# Altium PCB DO NOT USE LKAS-EPS_PCB_V2I1.PcbDoc (part 2 of 2)
Units mil, origin at the board's own origin, x right, y up, seen from the top; angles counter-clockwise.
Board outline 1667 x 1739 mil, 2 copper layers (Top Layer, Bottom Layer); 50 components, 66 nets, 279 pads, 103 vias.
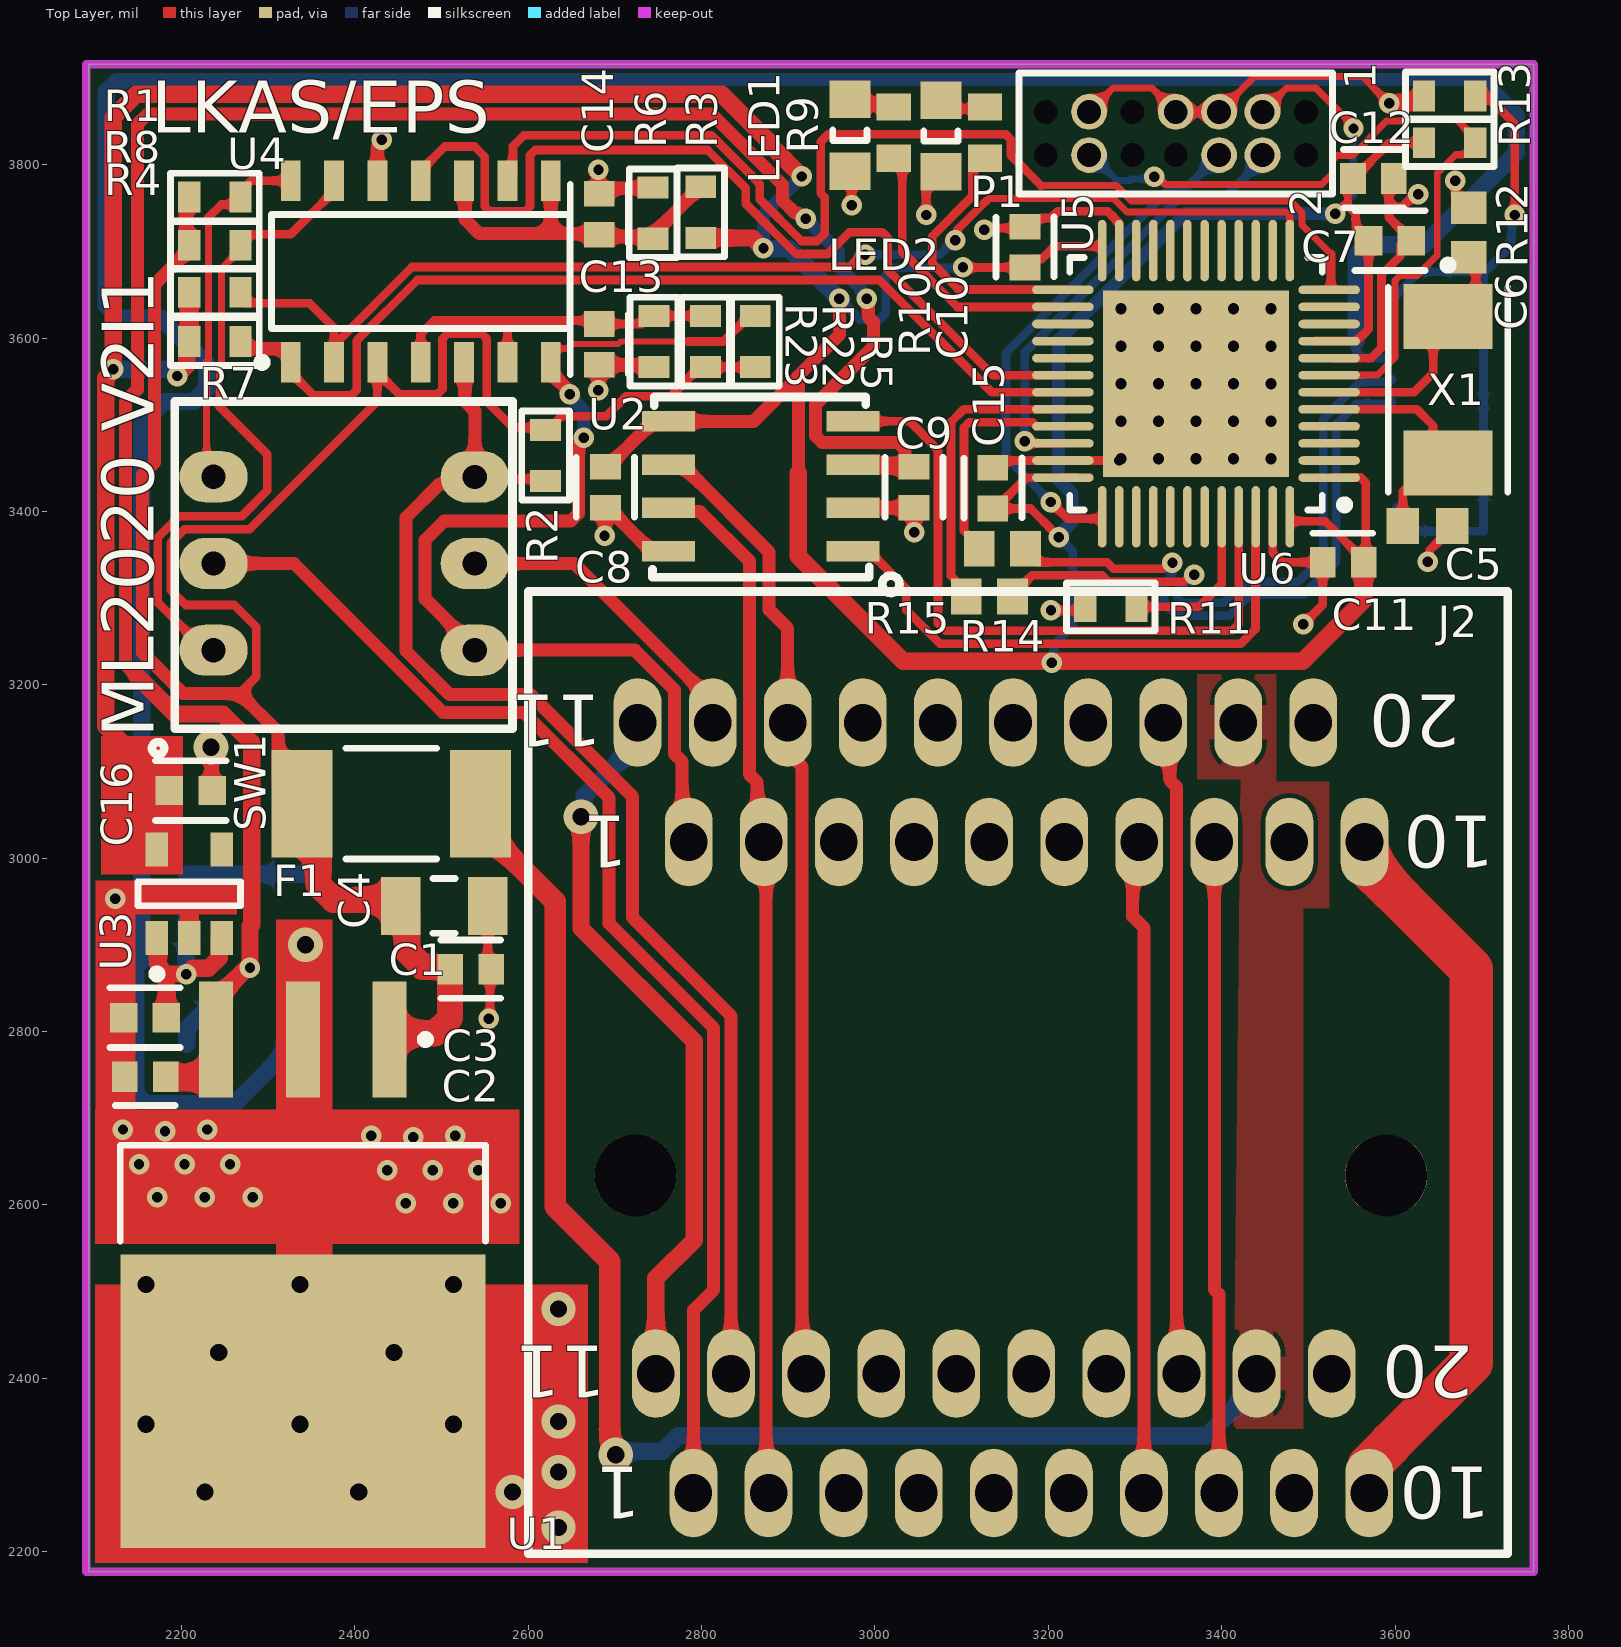
[diagram p0: Top Layer view]

## Via types
v1: diameter 23.62, hole 12, Top Layer to Bottom Layer, tented both sides, 58 vias
v2: diameter 19.68, hole 13, Top Layer to Bottom Layer, 25 vias
v3: diameter 39.37, hole 19.68, Top Layer to Bottom Layer, tented both sides, 15 vias
v4: diameter 40, hole 20, Top Layer to Bottom Layer, tented both sides, 4 vias
v5: diameter 23.62, hole 12, Top Layer to Bottom Layer, 1 vias

## Nets (pads, with @x,y where several pads share a name; then routed paths per layer and width w, separated by ;. In a path a pad name is that pad's centre, name@x,y a point inside that pad or via, vN(x,y) a via of type N, cw(c..) or ccw(c..) an arc to the next point about the centre after c; other vN are vias at no path point) (continued)
PA4: U5.14 U6.14
PA5: U5.15 U6.15
PA6: U5.16 U6.16
PA7: U5.17 U6.17
PA8: U5.29 U6.29
PA15: U5.38 U6.38
PB0: U5.18 U6.18
PB1: U5.19 U6.19
PB2: U5.20 U6.20
PB3: U5.39 U6.39
PB4: U5.40 U6.40
PB5: U5.41 U6.41
PB6: U5.42 U6.42
PB7: U5.43 U6.43
PB10: U5.21 U6.21
PB11: U5.22 U6.22
PB14: U5.27 U6.27
PB15: U5.28 U6.28
PC13: U5.2 U6.2
PC14: U5.3 U6.3
PC15: U5.4 U6.4
SHIELD: J3.6 J3.7 J3.8 J3.9 J3.10 J3.11 R13.1 | length 778.7
  Top Layer w10: R13.1@3692.53,3887.42 R13.1@3692.53,3892.34 ; R13.1@3693.53,3891.42 3738.19,3846.76 v1(3738.19,3742)
  Bottom Layer w10: J3.7 3601.61,3403.65 3628.1,3377.15 J3.9 J3.11 J3.10 J3.8 ; J3.6 3601.61,3649.87 3628.1,3676.36 J3.8 ; v1(3738.19,3742) 3738.19,3738.31 3734.4,3734.53 3734.4,3706.8 3703.97,3676.36 J3.8
STATUS: R9.1 U5.26 U6.26 | length 312.6
  Top Layer w10: R9.1@3028,3804 3031.39,3800.61 3031.39,3699.61 3095.08,3635.92 U5.26
SWCLK: P1.6 U5.37 U6.37 | length 600
  Top Layer w10: v1(3202.84,3410.84) 3222.06,3391.62 U6.37@3261.97,3391.62
  Bottom Layer w10: v1(3202.84,3410.84) 3202.62,3410.84 3151.07,3462.39 3151.07,3583.03 3344.11,3776.07 3362.07,3776.07 3394,3808 P1.6@3397,3808
SWDIO: P1.4 U5.34 U6.34 | length 513.9
  Top Layer w10: v1(3172.88,3481) 3175.36,3478.52 3211.77,3478.52 U5.34
  Bottom Layer w10: v1(3172.88,3481) 3172.88,3583.63 3350.32,3761.07 3402.07,3761.07 3447,3806 P1.4
UART2_RX: R4.1 U4.2 U5.13 U6.13 | length 1409
  Top Layer w8: 3128,3758 3129,3759 3131,3761 3274.92,3761 3290.6,3745.31 3473.9,3745.31 3478.58,3740.63 3478.58,3731.32 U5.13
  Top Layer w10: R4.1@2265,3648.08 2272.8,3640.28 2347.72,3640.28 2376,3612 U4.2 2382.42,3578.42 2382.42,3598.42 2466,3682 2970.85,3682 2984.81,3695.97 v1(2988.5,3695.97) ; v1(3092.52,3712.89) 3095.13,3715.49 3095.13,3725.13 3128,3758 ; U5.13@3478.5,3731.32 U5.13@3478.5,3732.89
  Bottom Layer w10: v1(2988.5,3695.97) 3074.32,3696 3091.21,3712.89 v1(3092.52,3712.89)
UART2_TX: U4.9 U5.12 U6.12 | length 1305.8
  Top Layer w8: 3191.52,3776 3278.3,3776 3295.99,3758.31 3479.28,3758.31 3492.5,3745.09 3492.5,3730.5 3526,3697
  Top Layer w10: U4.9 2582.42,3787.87 2582.42,3821.42 2595,3834 2811,3834 2867,3778 2867,3760.21 2915.21,3712 2933.52,3712 2942.07,3720.55 2942.07,3762.17 2937.38,3766.87 2937.38,3826.52 2945.86,3835 3150.83,3835 3156.68,3829.14 3156.68,3810.84 3191.52,3776 ; U6.12 3522.72,3655.61 3526,3658.89 3526,3697
UART3_RX: R7.1 U4.1 U5.31 U6.31 | length 1147.9
  Top Layer w10: U4.1 2326,3560.19 2352.19,3534 2396.14,3534 2402,3539.86 2402,3596.79 2472.21,3667 3005.06,3667 3134.57,3537.5 U6.31
  Top Layer w15: R7.1 2268,3593.02 2273.3,3587.73 2322.08,3587.73 2326,3583.81 U4.1
UART3_TX: U4.11 U5.30 U6.30 | length 1048.3
  Top Layer w10: U4.11 2476,3793.26 2503.74,3821 2538,3821 2550,3809 2550,3751.86 2555.86,3746 2596.14,3746 2602,3751.86 2602,3811 2608,3817 2806.79,3817 2851,3772.79 2851,3755 2909,3697 2945.59,3697 2970.59,3722 3008.54,3722 3014.39,3716.14 3014.39,3678.88 3136.1,3557.18 U5.30
USB_N: R14.1 U5.32 U6.32 | length 334.5
  Top Layer w10: R14.1@3105.43,3308 3102.38,3308 3092.71,3317.67 3092.71,3320.72 3087.72,3325.71 3087.72,3503.17 3102.36,3517.81 U5.32
USB_P: R15.1 U5.33 U6.33 | length 235.2
  Top Layer w10: R15.1 3120.43,3359.95 3102.72,3377.66 3102.72,3496.95 3108.57,3502.81 3181.73,3502.81 U5.33@3186.34,3498.2
USB_R_N: J3.2 R14.2 | length 694.5
  Top Layer w10: R14.2@3172.57,3314.34 3172.57,3317.29 3181.61,3326.33 3261.52,3326.33 3268.92,3318.93 3356.58,3318.93 3364.54,3326.9 v1(3368.23,3326.9)
  Bottom Layer w10: v1(3368.23,3326.9) 3367.03,3326.9 3348.78,3308.65 3348.78,3300.37 3354.64,3294.51 3401.81,3294.51 3426.2,3318.9 3488.37,3318.9 3517,3347.53 3517,3506.87 3559.6,3549.47 3593.81,3549.47 J3.2
USB_R_P: J3.3 R15.2 | length 699.4
  Top Layer w10: R15.2@3171.15,3356.47 3186.29,3341.33 3267.73,3341.33 3275.14,3333.93 3332.68,3333.93 3339.49,3340.74 v1(3343.18,3340.74)
  Bottom Layer w10: v1(3343.18,3340.74) 3341.58,3339.14 3341.58,3322.66 3333.78,3314.86 3333.78,3294.15 3348.43,3279.51 3408.02,3279.51 3432.41,3303.9 3494.58,3303.9 3532,3341.32 3532,3500.66 3555.39,3524.05 3593.98,3524.05 J3.3
V_USB: D1.1 J3.1 | length 3617.5
  Bottom Layer w10: 3555.11,3597.23 3555.11,3584.98 3563.23,3576.87 3595.61,3576.87 J3.1
  Bottom Layer w15: 2132.09,3896 2134.59,3898.5 3690.97,3898.5 3693.47,3896
  Bottom Layer w20: 2132.09,3896 2125.09,3896 2113.37,3884.28 2113.37,3637.64 2128.02,3623 2176.36,3623 2229,3570.36 2229,3541.53 2214.36,3526.88 2180.88,3526.88 2154,3500 2154,2881.62 2147.14,2874.76 2147.14,2728.72 2158.86,2717 2261.36,2717 2341,2796.64 D1.1 ; 3555.11,3597.23 3555.11,3696.35 3566.23,3707.47 3633.47,3707.47 3740,3814 3740,3856.47 3700.47,3896 3693.47,3896
pads on no net: J1.3 J1.4 J1.5 J1.6 J1.9 J1.15 J1.16 J1.17 J1.20 J2. J2.3 J2.4 J2.5 J2.6 J2.9 J2.15 J2.16 J2.17 J2.20 J3.4 P1.1 P1.2 P1.8 P1.9 P1.10 P1.13 P1.14 U3.4

## Polygon pours and split planes (outlines as drawn)
IGN1 on Top Layer "NONET_L-01_P-001" (solid, pour order 0): 3414,2342 3494,2342 3494,2942 3524,2942 3524,3088 3463,3088 3463,3222 3372,3222 3372,3091 3422,3091 3422,3090
GND on Bottom Layer "NONET_L-01_P-001" (solid, remove dead copper, pour order 1): 2096,2181 3758,2181 3758,3914 2094,3914

## Keep-outs
Keep-Out Layer:
  lines w10: 2090,2177 2090,2958 2090,3916 3760,3916 3760,2177 2090,2177

## Other copper
Top Layer:
  rectangle net GND: 2100,2555 2590,2710
  rectangle net GND: 2101,2682 2147.14,2974
  rectangle net GND: 2107,2935 2264.07,2972.78
  rectangle net +3V3: 2107,2981 2202,3141
  rectangle net GND: 2309,2482 2374,2929
  rectangle net GND: 2100,2187 2669,2508

## Silkscreen, mask and mechanical layers (free items; w line width, h text height)
Top Overlay:
  text "LKAS/EPS" at 2165,3837 h60
  text "ML2020 V2I1" at 2168.04,3138.87 h60 r90

## Text inside footprints (layer, text, board x,y; h text height)
J1: Top Overlay "1" at 2715.16,3048.7 h60 r180; Top Overlay "11" at 2685.16,3188.7 h60 r180; Top Overlay "20" at 3675.16,3188.7 h60 r180; Top Overlay "10" at 3715.16,3048.7 h60 r180
J2: Top Overlay "10" at 3710.1,2297.72 h60 r180; Top Overlay "20" at 3690.1,2437.72 h60 r180; Top Overlay "11" at 2690.11,2437.72 h60 r180; Top Overlay "1" at 2730.11,2297.72 h60 r180
J3: Mechanical 1 "PCB Edge" at 3732,4046.76 h39.37 r90
P1: Top Overlay "2" at 3515,3740 h36 r90; Top Overlay "1" at 3577.69,3886.31 h36 r90